# Altium PCB PCB_EN1093.PcbDoc
Units mm, origin at the board's own origin, x right, y up, seen from the top; angles counter-clockwise.
Board outline 80.26 x 60.25 mm, 2 copper layers (Top Layer, Bottom Layer); 26 components, 25 nets, 119 pads, 7 vias.
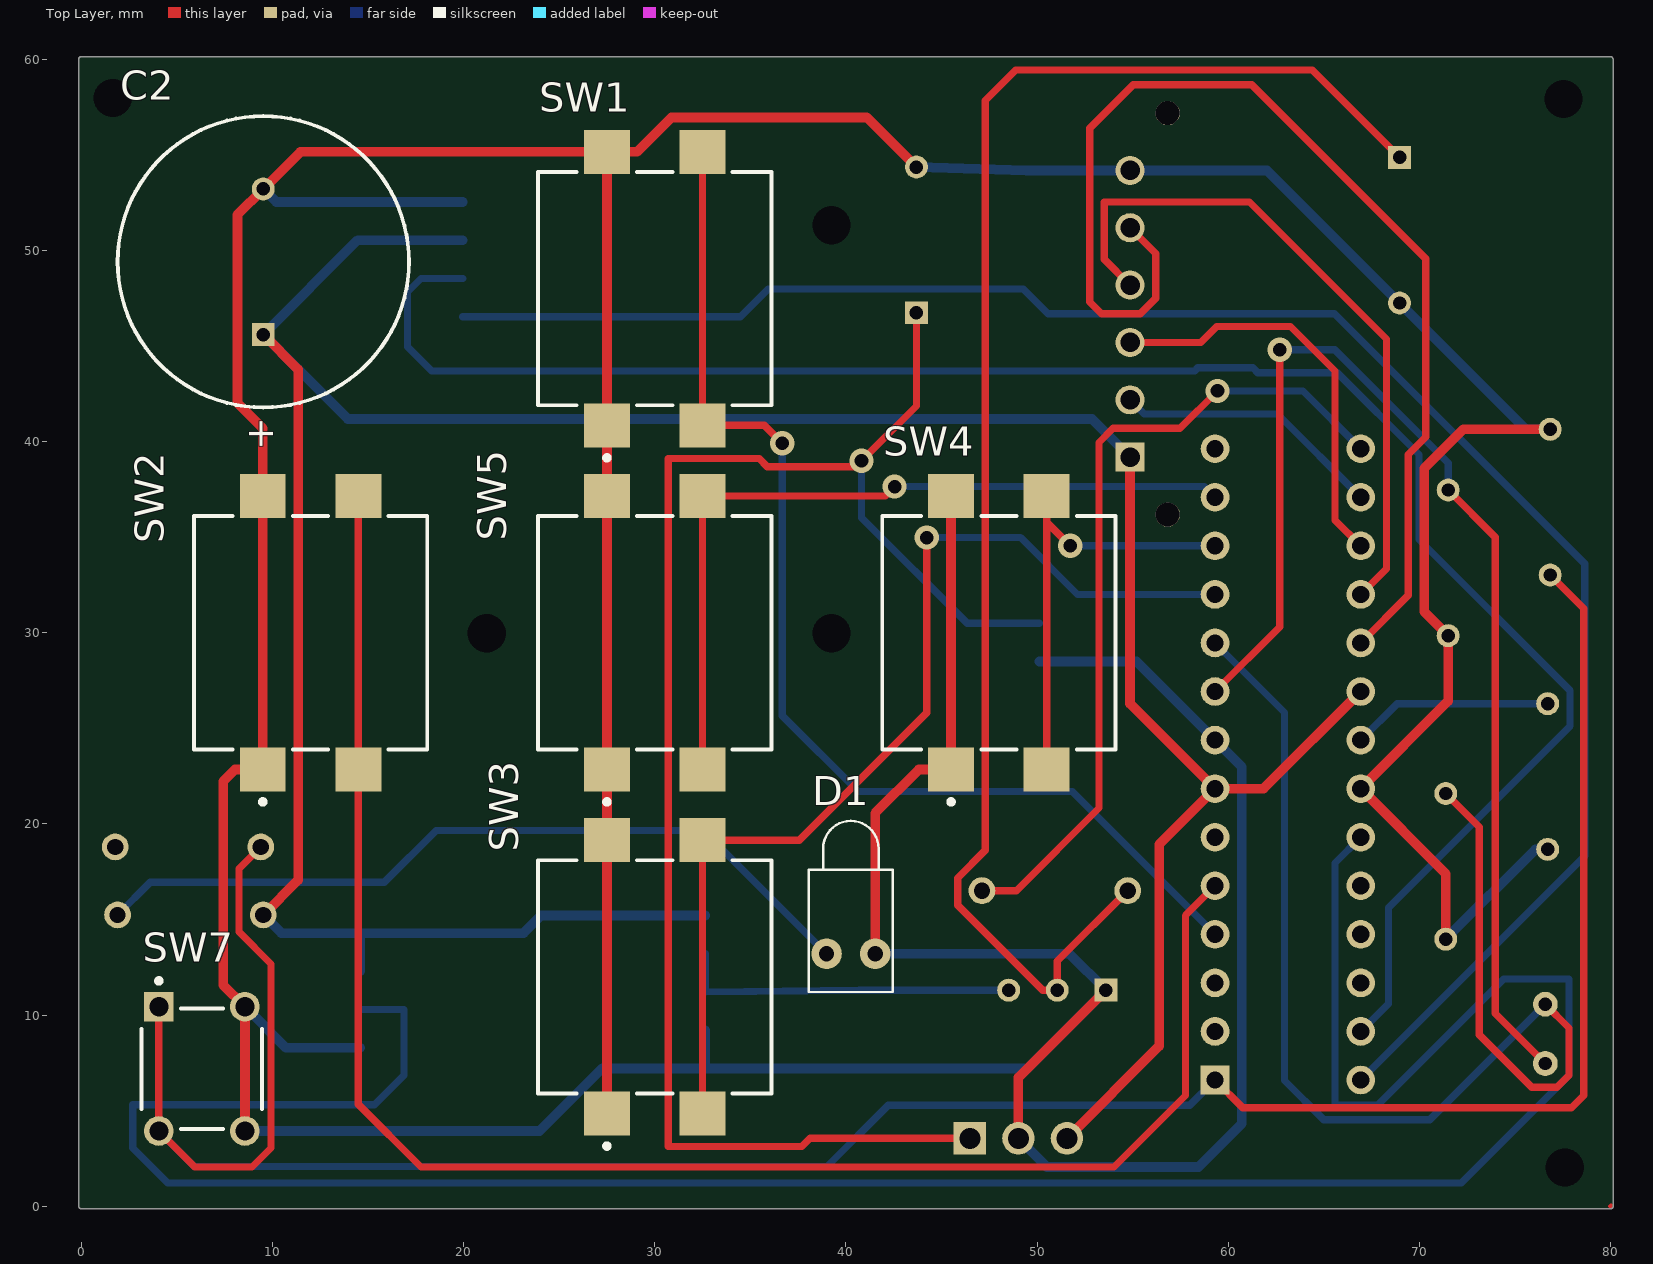
[diagram p0: Top Layer view]
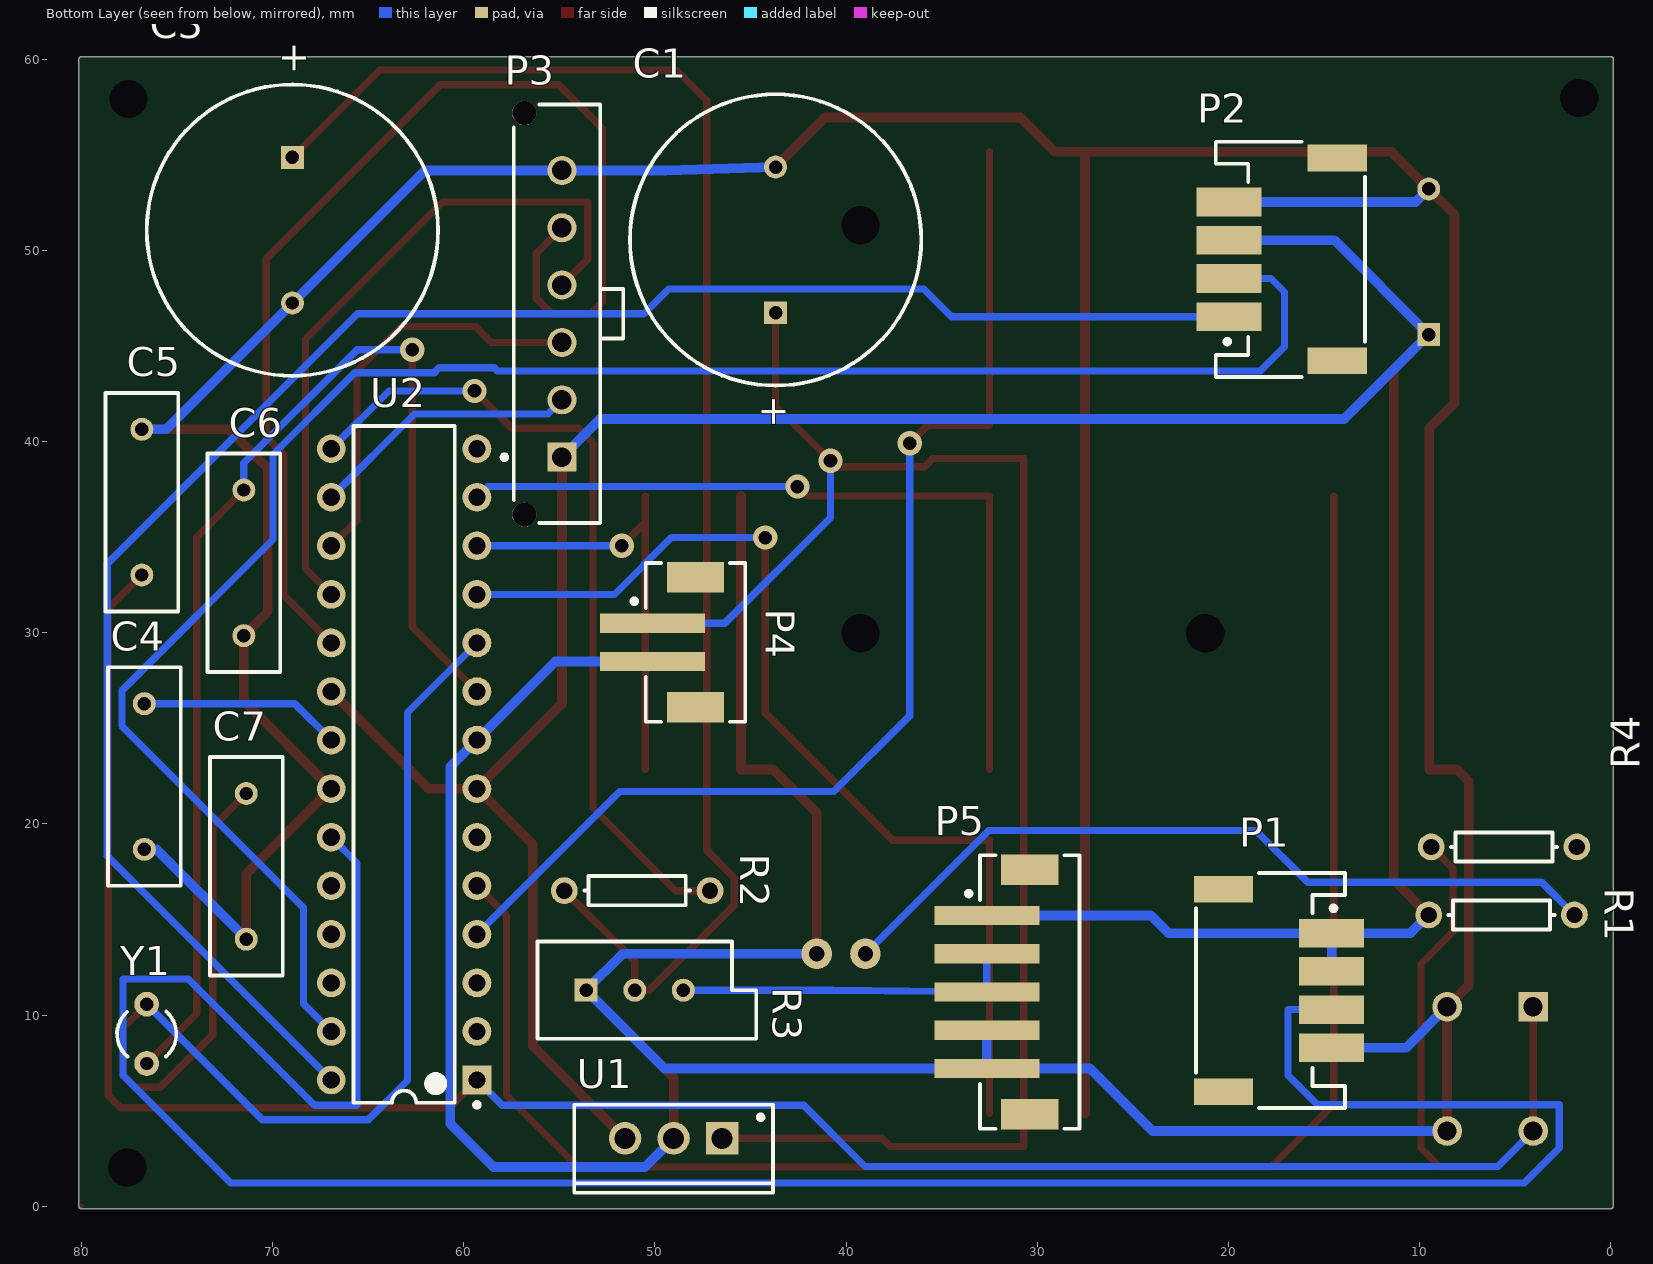
[diagram p1: Bottom Layer view, seen from below]
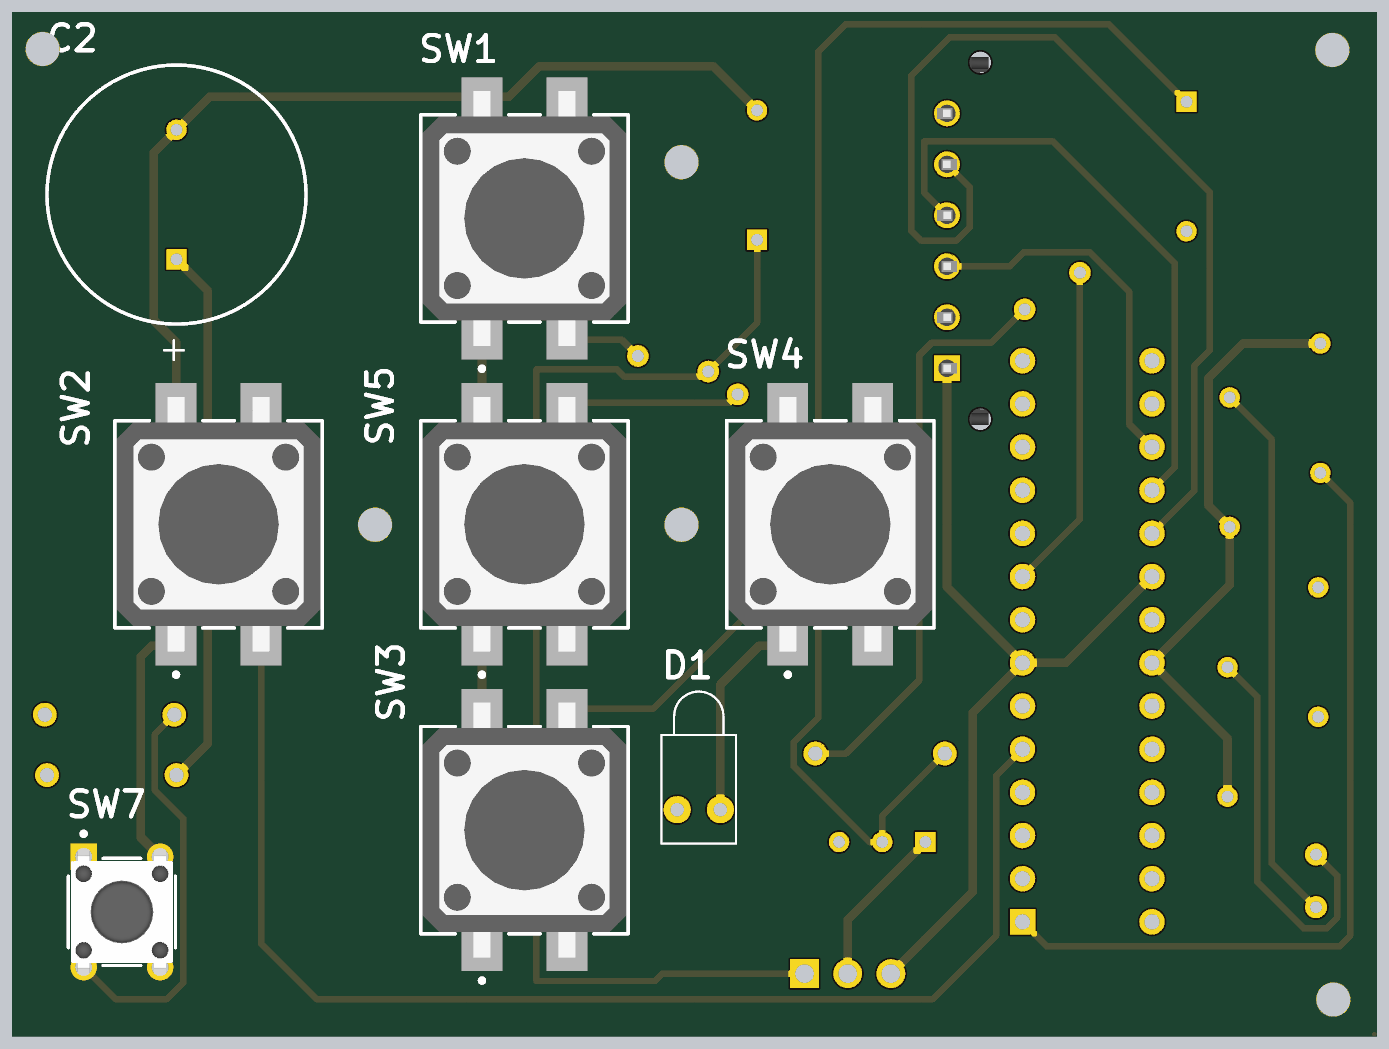
[diagram p2: 3D render of the assembled board from above, using the file's embedded part models]

## Layer stack, top to bottom
Top Solder: solder mask 0.0102, Solder Resist, Dk 3.5
Top Layer: signal copper 0.0356
Dielectric 1: dielectric 0.32, FR-4, Dk 4.8
Bottom Layer: signal copper 0.0356
Bottom Solder: solder mask 0.0102, Solder Resist, Dk 3.5

## Board outline
0,-0.127 cw(c0,0) -0.127,0 -0.127,60 cw(c0,60) 0,60.127 80,60.127 cw(c80,60) 80.127,60 80.127,0.059 cw(c80.01,0.01) 80.137,0.01 cw(c80.01,0.01) 80.1,-0.08 80.09,-0.09 cw(c80,-0.001) 80,-0.127

## Design rules (kind name [scope] priority, off if disabled: settings)
Clearance [All] p1: gap=0.381 ignorepadtopadclearanceinfootprint=TRUE except(0.508: Arc-Hole Track-Hole SMDPad-Hole THPad-Hole Via-Hole Fill-Hole Poly-Hole Region-Hole Text-Hole)
ComponentClearance [All] p1: gap=0.254 collisioncheckmode=3 verticalgap=0.508 showdistances=FALSE
PolygonConnect [All] p1: connectstyle=Relief reliefconductorwidth=0.254 reliefentries=4 polygonreliefangle="90 Angle" airgapwidth=0.254
RoutingVias [All] p1: holewidth=0.711 width=1.27 viastyle="Through Hole" minholewidth=0.711 minwidth=1.27 maxholewidth=0.711 maxwidth=1.27
SilkToSolderMaskClearance [IsPad] p1 off: minsilkscreentomaskgap=0.254 clearancetoexposedcopper=TRUE
SolderMaskExpansion [All] p1: expansion=0.102 istentingtop=FALSE
Width Width_1 [InNet('+5') or InNet('GND')] p1: maxlimit=0.635 minlimit=0.381 preferedwidth=0.508
Width [All] p2: maxlimit=0.508 minlimit=0.254 preferedwidth=0.381
28 further rules are at their usual default settings.

## Components (designator, comment, footprint, x,y, rotation, side; value= is the part's Value field where it differs from the comment)
C1 "330nF" RB7.6-15 43.688,50.546 r270 bottom
C2 "100nF" RB7.6-15 9.525,49.403 r270 top
C3 "Cap Pol1" RB7.6-15 68.961,51.054 r90 bottom value=10pF
C4 "100nF" RAD-0.3 76.708,22.479 r90 bottom
C5 "100nF" RAD-0.3 76.835,36.83 r270 bottom
C6 "22pF" RAD-0.3 71.501,33.655 r90 bottom
C7 "22pF" RAD-0.3 71.374,17.78 r90 bottom
D1 "LED1" LED-1 40.259,13.208 r90 top
P1 "620104131822" 620104131822 17.805,11.287 r270 bottom
P2 "620104131822" 620104131822 16.764,49.53 r90 bottom
P3 "66200611122" 66200611122 55.119,46.681 r270 bottom
P4 "620302124022" 620302124022 47.879,29.493 r90 bottom
P5 "620305124022" 620305124022 30.389,11.208 r90 bottom
R1 "330" AXIAL-0.3 5.715,15.24 r180 bottom
R2 "5K" AXIAL-0.3 50.927,16.51 r180 bottom
R3 "1K" VR5 51.054,11.303 r180 bottom
R4 "10K" AXIAL-0.3 5.588,18.796 r0 bottom
SW1 "B3FS-4052P" FP-B3FS-4052P-MFG 30,48 r90 top
SW2 "B3FS-4052P" FP-B3FS-4052P-MFG 12,30 r90 top
SW3 "B3FS-4052P" FP-B3FS-4052P-MFG 30,12 r90 top
SW4 "B3FS-4052P" FP-B3FS-4052P-MFG 48,30 r90 top
SW5 "B3FS-4052P" FP-B3FS-4052P-MFG 30,30 r90 top
SW7 "EVQ-PAG07K" FP-EVQ-PAG07K-MFG 6.314,7.187 r0 top
U1 "L7805CV" TO220 49.022,3.556 r0 bottom
U2 "ATmega328P-PU" 28P3 63.119,23.114 r0 bottom
Y1 "XTAL" R38 76.581,9.017 r180 bottom

## Footprints (in the part's own frame and the unit in brackets; to place one, negate y for a bottom-side part, rotate by r counter-clockwise, add the part's x,y. Pads: shape width x height; smd on the part's side, far side on the other; paste and mask are expansions set on the pad)
28P3 [mm] "28-Pin Plastic Dual In-Line Package (PDIP)"
  rect 1.5x1.5 hole 0.9: 1(-3.81,16.51)
  round 1.5 hole 0.9: 2(-3.81,13.97) 3(-3.81,11.43) 4(-3.81,8.89) 5(-3.81,6.35) 6(-3.81,3.81) 7(-3.81,1.27) 8(-3.81,-1.27) 9(-3.81,-3.81) 10(-3.81,-6.35) 11(-3.81,-8.89) 12(-3.81,-11.43) 13(-3.81,-13.97) 14(-3.81,-16.51) 15(3.81,-16.51) 16(3.81,-13.97) 17(3.81,-11.43) 18(3.81,-8.89) 19(3.81,-6.35) 20(3.81,-3.81) 21(3.81,-1.27) 22(3.81,1.27) 23(3.81,3.81) 24(3.81,6.35) 25(3.81,8.89) 26(3.81,11.43) 27(3.81,13.97) 28(3.81,16.51)
  silkscreen extent -3.93,-17.7 2.65,17.93, body extent -3.6,-17.65 3.6,17.65, height 4.58
66200611122 [mm] "3.00mm Male Single Row Vertical Header, 6p"
  rect 1.52x1.52 hole 1.02: 1(7.5,0.255)
  round 1.52 hole 1.02: 2(4.5,0.255) 3(1.5,0.255) 4(-1.5,0.255) 5(-4.5,0.255) 6(-7.5,0.255)
  round 1.27 hole 1.27 unplated: MH1(-10.5,-1.705) MH2(10.5,-1.705)
  silkscreen extent -10.95,-2.88 10.95,3.46, body extent -10.82,-2.19 10.83,3.38, height 9.93
620104131822 [mm] "2.00mm SMT Male Horizontal Shrouded Header, 4p"
  rect 1.5x3.4 smd: 1(-3,3.2) 2(-1,3.2) 3(1,3.2) 4(3,3.2)
  rect 1.4x3.1 smd: MP1(-5.3,-2.45) MP2(5.3,-2.45)
  silkscreen extent -6.15,-3.9 6.15,3.9, body extent -6,-3.8 6,4.8, height 5.57
620302124022 [mm] "2.00mm SMT Male Vertical Shrouded Header, 2p"
  rect 1x5.5 smd: 1(1,2.25) 2(-1,2.25)
  rect 1.6x3 smd: MP1(-3.4,0) MP2(3.4,0)
  silkscreen extent -4.15,-2.6 4.15,3.32, body extent -4,-2.5 4,4.51, height 6.77
620305124022 [mm] "2.00mm SMT Male Vertical Shrouded Header, 5p"
  rect 1x5.5 smd: 1(4,2.25) 2(2,2.25) 3(0,2.25) 4(-2,2.25) 5(-4,2.25)
  rect 1.6x3 smd: MP1(-6.4,0) MP2(6.4,0)
  silkscreen extent -7.15,-2.6 7.15,3.32, body extent -7,-2.5 7,4.51, height 6.77
AXIAL-0.3 [mm] "Axial Device, Thru-Hole; 2 Leads; 0.3 in Pin Spacing"
  round 1.4 hole 0.85: 1(-3.81,0) 2(3.81,0)
  silkscreen extent -2.77,-0.76 2.77,0.76
FP-B3FS-4052P-MFG [mm]
  rect 2.3x2.4 smd paste+0 mask+0: 1(-7.15,2.5) 2(7.15,2.5) 3(-7.15,-2.5) 4(7.15,-2.5)
  silkscreen extent -8.97,-6.1 6.1,6.1, body extent -8.4,-6.2 8.4,6.2, height 0.25
FP-EVQ-PAG07K-MFG [mm]
  rect 1.55x1.55 hole 1 paste-1000 mask+0: A(-2.25,3.25)
  round 1.55 hole 1 paste-1000 mask+0: A'(-2.25,-3.25) B(2.25,3.25) B'(2.25,-3.25)
  silkscreen extent -3.15,-3.15 3.15,4.72, body extent -3.25,-4.13 3.25,4.13, height 0.25
LED-1 [mm] "LED; 2 Leads"
  round 1.6 hole 0.8: 1(0,1.27) 2(0,-1.27)
  silkscreen extent -2,-2.2 6.95,2.2
R38 [mm] "Crystal, Thru-Hole; 2 Leads; Body 3.1 x 8.2 mm (Dia.xH)"
  round 1.3 hole 0.7: 1(0,1.55) 2(0,-1.55)
  silkscreen extent -1.55,-1.19 1.55,1.17
RAD-0.3 [mm] "Radial Cap, Thru-Hole; 2 Leads; 0.3 in Pin Spacing"
  round 1.2 hole 0.7: 1(-3.81,0) 2(3.81,0)
  silkscreen extent -5.71,-1.91 5.71,1.91
RB7.6-15 [mm] "Polarized Capacitor (Radial); 2 Leads"
  rect 1.2x1.2 hole 0.7: 1(3.81,0)
  round 1.2 hole 0.7: 2(-3.81,0)
  silkscreen extent -7.62,-7.62 7.62,7.62
TO220 [mm] "TO, Thru-Hole, Vertical, Heatsink Mounted; 3 In-Line Leads; Pitch 2.54 mm"
  rect 1.7x1.7 hole 1.1: 1(-2.54,0)
  round 1.7 hole 1.1: 2(0,0) 3(2.54,0)
  silkscreen extent -5.2,-1.75 5.2,2.85, body extent -5.25,-1.8 5.25,2.9, height 19.7
VR5 [mm] "Thru-Hole; 3 Leads"
  rect 1.2x1.2 hole 0.7: 1(-2.54,0)
  round 1.2 hole 0.7: 2(0,0) 3(2.54,0)
  silkscreen extent -5.08,-2.54 6.35,2.54

## Part data
C1 C2: library part "Cap Pol1", "Polarized Capacitor (Radial)", LatestRevisionDate=17-Jul-2002, LatestRevisionNote="Re-released for DXP Platform.", PackageDescription="Polarized Capacitor (Radial); 2 Leads", PackageReference=RB7.6-15, Published=8-Jun-2000, Publisher="Altium Limited"
C3: "Polarized Capacitor (Radial)", LatestRevisionDate=17-Jul-2002, LatestRevisionNote="Re-released for DXP Platform.", PackageDescription="Polarized Capacitor (Radial); 2 Leads", PackageReference=RB7.6-15, Published=8-Jun-2000, Publisher="Altium Limited"
C4 C5 C6 C7: library part Cap, "Capacitor", LatestRevisionDate=17-Jul-2002, LatestRevisionNote="Re-released for DXP Platform.", PackageDescription="Radial Cap, Thru-Hole; 2 Leads; 0.3 in Pin Spacing", PackageReference=RAD-0.3, Published=8-Jun-2000, Publisher="Altium Limited"
D1: "Typical RED GaAs LED", LatestRevisionDate=08-Jul-2005, LatestRevisionNote="Mech Layer 1 removed.", PackageDescription="LED; 2 Leads", PackageReference=LED-1, Published=8-Jun-2000, Publisher="Altium Limited"
P1 P2: library part CMP-1502-00671-1, "Male Shrouded Header WR-WTB, SMT, Right Angled, pitch 2 mm, 1 x 4 position", Contact Resistance=20mOhm, Manufacturer="Wurth Elektronik", Operating Temperature=-25to85degC, Working Voltage=100VAC, Datasheet URL=https://katalog.we-online.de/em/datasheet/6201xx131822.pdf, Gender=Male, Manufacturer URL=http://www.we-online.de, Mounting Technology=SMT, Orientation=RightAngled, Package Reference=620104131822, Packaging=TapeandReel, Part Number=620104131822, Pitch=2mm, Position=1x4, Publisher=WurthElektronik
P3: library part CMP-1502-00444-1, "THT Male Header WR-MPC3, Vertical, Single Row, pitch 3 mm, 6 pins", Contact Resistance=10mOhm, Manufacturer="Wurth Elektronik", Operating Temperature=-40to105degC, Working Voltage=250VAC, Datasheet URL=https://katalog.we-online.de/em/datasheet/6620xx11122.pdf, Gender=Male, Manufacturer URL=http://www.we-online.de, Mounting Technology=THT, Orientation=Vertical, Package Reference=66200611122, Packaging=Tube, Part Number=66200611122, Pin Number=6, Pitch=3mm, Publisher=WurthElektronik
P4: library part CMP-1502-00660-1, "Male Shrouded Header WR-WTB, SMT, Vertical, pitch 2 mm, 1 x 2 position", Contact Resistance=20mOhm, Manufacturer="Wurth Elektronik", Operating Temperature=-25to85degC, Working Voltage=100VAC, Datasheet URL=https://katalog.we-online.de/em/datasheet/6203xx124022.pdf, Gender=Male, Manufacturer URL=http://www.we-online.de, Mounting Technology=SMT, Orientation=Vertical, Package Reference=620302124022, Packaging=TapeandReel, Part Number=620302124022, Pitch=2mm, Position=1x2, Publisher=WurthElektronik
P5: library part CMP-1502-00663-1, "Male Shrouded Header WR-WTB, SMT, Vertical, pitch 2 mm, 1 x 5 position", Contact Resistance=20mOhm, Manufacturer="Wurth Elektronik", Operating Temperature=-25to85degC, Working Voltage=100VAC, Datasheet URL=https://katalog.we-online.de/em/datasheet/6203xx124022.pdf, Gender=Male, Manufacturer URL=http://www.we-online.de, Mounting Technology=SMT, Orientation=Vertical, Package Reference=620305124022, Packaging=TapeandReel, Part Number=620305124022, Pitch=2mm, Position=1x5, Publisher=WurthElektronik
R1 R2 R4: library part Res1, "Resistor", LatestRevisionDate=17-Jul-2002, LatestRevisionNote="Re-released for DXP Platform.", PackageDescription="Axial Device, Thru-Hole; 2 Leads; 0.3 in Pin Spacing", PackageReference=AXIAL-0.3, Published=8-Jun-2000, Publisher="Altium Limited"
R3: library part RPot, "Potentiometer", LatestRevisionDate=17-Jul-2002, LatestRevisionNote="Re-released for DXP Platform.", PackageDescription="Variable Resistor, Thru-Hole; 3 Leads", PackageReference=VR5, Published=8-Jun-2000, Publisher="Altium Limited", Set Position=0.5, Sim Note="Enter the Resistance value and the set point into parameter fields."
SW1 SW2 SW3 SW4 SW5: library part CMP-08834-000051-1, "SWITCH TACT SPST-NO 0.05A 24V", Max Operating Temperature=70°C, Max Voltage Rating (DC)=24V, Min Operating Temperature=-25°C, Operating Force=150gf, Illumination Type=Non-Illuminated, Mechanical Life=3000000Cycles, Mount="Surface Mount", Packaging="Tape and Reel", Radiation Hardening=No, RoHS Compliant=Yes, Switch Function=Off-Mom, Switch Travel=0.25mm, Termination="Gull Wing", Throw Configuration=SPST
SW7: library part CMP-05618-000034-1, "SWITCH TACTILE SPST-NO 0.02A 15V", Actuator Color=Black, Contact Current Rating=20mA, Contact Resistance=50mR, Max Operating Temperature=70°C, Max Voltage Rating (DC)=15V, Min Operating Temperature=-20°C, Operating Force=2.6N, Package Quantity=500, Actuator Length=3.1mm, Actuator Type=Standard, Current Rating=20mA, Depth=7.8mm, Electrical Life=50000Cycles, Illumination Type=Non-Illuminated, Lead Free="Lead Free", Length=6mm, Max Current Rating=20mA, Mechanical Life=50000Cycles, Mount="Through Hole", Orientation=Straight, Packaging=Bulk, Radiation Hardening=No, RoHS Compliant=Yes, Series=EVQPA, Size=6mm, Switch Function=Off-Mom, Switch Travel=0.25mm, Termination="PC Pin", Throw Configuration=SPST, Voltage Rating (DC)=15V
U1: library part CMP-0244-00483-1, "Positive Voltage Regulator, 5V, 3-Pin TO-220", ComponentLink1Description="Manufacturer URL", ComponentLink1URL=http://www.st.com, ComponentLink2Description=Datasheet, ComponentLink2URL=http://www.st.com/internet/com/TECHNICAL_RESOURCES/TECHNICAL_LITERATURE/DATASHEET/CD00000444.pdf, ComponentLink3Description="Package Specification", ComponentLink3URL=http://www.st.com/internet/com/TECHNICAL_RESOURCES/TECHNICAL_LITERATURE/PACKAGE_INFORMATION/CD00004649.pdf, DatasheetVersion=16/11/2011, PackageDescription="TO, Thru-Hole, Vertical, Heatsink Mounted; 3 In-Line Leads; Pitch 2.54 mm", PackageReference=TO220, PackageVersion=ver3.0
U2: library part CMP-0095-00013-2, "8-bit AVR Microcontroller, 32KB Flash, 1KB EEPROM, 2KB SRAM, 28-pin PDIP, Industrial Grade (-40°C to 85°C)", ComponentLink1Description="Manufacturer URL", ComponentLink1URL=http://www.atmel.com/, ComponentLink2Description="ATmega48A/48PA/88A/88PA/168A/168PA/328/328P Datasheet", ComponentLink2URL=http://www.atmel.com/dyn/resources/prod_documents/8271.pdf, ComponentLink3Description="ATmega48A/48PA/88A/88PA/168A/168PA/328/328P Summary", ComponentLink3URL=http://www.atmel.com/dyn/resources/prod_documents/8271S.pdf, DatasheetVersion="revD, May-2011", PackageDescription="28-lead (0.300\"/7.62mm Wide) Plastic Dual Inline Package (PDIP)", PackageReference=28P3, PackageVersion="revB, Sep-2001", RevisionNote="DatasheetVersion updated. URLs added."
Y1: "Crystal Oscillator", LatestRevisionDate=17-Jul-2002, LatestRevisionNote="Re-released for DXP Platform.", PackageDescription="Crystal, Thru-Hole; 2 Leads; Body 3.1 x 8.2 mm (Dia.xH)", PackageReference=R38, Published=8-Jun-2000, Publisher="Altium Limited"

## Free pads (board coordinates)
  oval 1.55x0.6 hole 2: 65(77.597,2.032) 66(21.209,29.972) 66(39.243,29.972) 66(39.243,51.308) 66(77.541,57.912) 68(1.651,57.968)

## Via types
v1: diameter 1.27, hole 0.711, Top Layer to Bottom Layer, 7 vias

## Nets (pads, with @x,y where several pads share a name; then routed paths per layer and width w, separated by ;. In a path a pad name is that pad's centre, name@x,y a point inside that pad or via, vN(x,y) a via of type N, cw(c..) or ccw(c..) an arc to the next point about the centre after c; other vN are vias at no path point)
+5: C2.1 P1.1 P1.2 P2.3 P3.1 P5.1 R1.1 U1.3 U2.7 U2.20 | length 168.6
  Top Layer w0.508: R1.1 11.354,17.069 11.354,43.764 C2.1 ; U1.3 56.388,8.382 56.388,18.923 U2.7 ; P3.1 54.864,26.289 U2.7 ; U2.20 61.849,21.844 U2.7
  Bottom Layer w0.508: R1.1 10.478,14.287 P1.1 ; P1.2 P1.1 ; P2.3 14.462,50.53 C2.1 13.945,41.173 52.872,41.173 P3.1 ; P5.1 24.06,15.208 23.139,14.287 P1.1
DLT: SW5.3 SW5.4 U2.13 | length 41.5
  Top Layer w0.381: SW5.3 SW5.4 42.052,37.15 v1(42.545,37.643)
  Bottom Layer w0.381: v1(42.545,37.643) 58.75,37.643 U2.13
GND: C1.2 C2.2 C3.2 C4.1 C5.1 C6.1 C7.1 D1.2 P1.4 P2.4 P3.6 P4.2 P5.4 P5.5 R3.1 SW1.1 SW1.2 SW2.1 SW2.2 SW3.1 SW3.2 SW4.1 SW4.2 SW5.1 SW5.2 SW7.B SW7.B' U1.2 U2.8 U2.22 | length 383.6
  Top Layer w0.508: SW7.B' SW7.B 7.428,11.573 7.428,22.226 8.052,22.85 SW2.1 SW2.2 9.5,40.69 8.179,42.012 8.179,51.867 C2.2 11.462,55.15 SW1.2 ; SW3.1 SW3.2 27.5,20.98 SW5.1 SW5.2 27.5,38.989 SW1.1 SW1.2 ; D1.2 41.529,20.564 43.815,22.85 SW4.1 SW4.2 ; C1.2 41.097,56.947 30.88,56.947 29.083,55.15 SW1.2 ; U1.2 49.022,6.731 R3.1 ; C7.1 71.374,17.399 U2.22 71.501,26.416 C6.1 70.256,31.09 70.256,38.608 72.288,40.64 C5.1
  Bottom Layer w0.508: SW7.B' 23.978,3.937 27.249,7.208 P5.5 ; SW7.B 10.714,8.287 P1.4 ; C2.2 10.208,52.53 P2.4 ; P5.4 P5.5 ; D1.2 51.689,13.208 R3.1 49.499,7.208 P5.5 ; C1.2 49.451,54.181 P3.6 62.024,54.181 C3.2 75.565,40.64 C5.1 ; U1.2 50.521,2.057 58.445,2.057 60.706,4.318 60.706,22.987 U2.8 55.2,28.493 P4.2 ; C7.1 76.073,18.669 C4.1
MIC: P1.3 U2.23 | length 135.6
  Bottom Layer w0.381: P1.3 16.891,10.287 16.891,6.858 15.342,5.309 2.692,5.309 2.692,3.048 4.521,1.219 72.187,1.219 77.826,6.858 77.826,11.887 74.411,11.887 67.806,5.282 65.583,5.282 65.583,17.958 U2.23
MISO: P3.4 U2.18 | length 36.5
  Top Layer w0.381: P3.4 53.518,49.527 53.518,52.527 61.112,52.527 68.275,45.364 68.275,33.35 U2.18
MOSI: P3.3 U2.17 | length 21.7
  Top Layer w0.381: P3.3 58.559,45.181 59.399,46.021 63.25,46.021 65.583,43.688 65.583,35.89 U2.17
NetC3_1: C3.1 R2.1 R3.2 | length 80.7
  Top Layer w0.381: R2.1 51.054,12.827 R3.2 50.29,11.303 45.845,15.748 45.845,17.169 47.295,18.618 47.295,57.836 48.888,59.429 64.396,59.429 C3.1
NetC4_2: C4.2 U2.21 | length 10.6
  Bottom Layer w0.381: U2.21 68.834,26.289 C4.2
NetC5_2: C5.2 R4.2 SW7.A SW7.A' U2.1 | length 136.5
  Top Layer w0.381: SW7.A SW7.A' 5.944,2.057 8.941,2.057 9.931,3.048 9.931,12.675 8.253,14.353 8.253,17.651 R4.2 ; U2.1 60.757,5.156 77.953,5.156 78.588,5.791 78.588,31.267 C5.2
  Bottom Layer w0.381: SW7.A' 5.918,2.083 39.014,2.083 42.215,5.283 57.988,5.283 U2.1
NetC6_2: C6.2 U2.9 Y1.2 | length 64.1
  Top Layer w0.381: U2.9 62.687,30.302 v1(62.687,44.806) ; C6.2 73.965,35.001 73.965,10.083 Y1.2
  Bottom Layer w0.381: v1(62.687,44.806) 65.568,44.806 71.501,38.873 C6.2
NetC7_2: C7.2 U2.10 Y1.1 | length 65.1
  Top Layer w0.381: C7.2 73.127,19.837 73.127,8.966 75.87,6.223 77.191,6.223 77.826,6.858 77.826,9.322 Y1.1
  Bottom Layer w0.381: U2.10 62.941,25.832 62.941,6.579 64.999,4.52 70.534,4.52 Y1.1
NetD1_1: D1.1 R1.2 | length 41.6
  Bottom Layer w0.381: R1.2 3.607,16.942 15.85,16.942 18.567,19.66 32.537,19.66 D1.1
NetP5_2: P5.2 P5.3 R3.3 | length 17.9
  Bottom Layer w0.381: P5.2 P5.3 40.684,11.303 R3.3
NXT: SW4.3 SW4.4 U2.12 | length 23.6
  Top Layer w0.381: SW4.3 50.5,35.784 ; SW4.4 50.5,35.784 ; v1(51.74,34.544) 50.5,35.784
  Bottom Layer w0.381: v1(51.74,34.544) U2.12
PLY: SW3.3 SW3.4 U2.11 | length 54.3
  Top Layer w0.381: SW3.3 SW3.4 37.565,19.15 44.221,25.806 v1(44.221,34.976)
  Bottom Layer w0.381: v1(44.221,34.976) 49.138,34.976 52.11,32.004 U2.11
PRVS: SW2.3 SW2.4 U2.5 | length 89.6
  Top Layer w0.381: SW2.4 SW2.3 14.5,5.337 17.78,2.057 54.026,2.057 57.76,5.791 57.76,15.215 U2.5
RCRD: SW1.3 SW1.4 U2.4 | length 60.5
  Top Layer w0.381: SW1.4 SW1.3 35.731,40.85 v1(36.678,39.903)
  Bottom Layer w0.381: v1(36.678,39.903) 36.678,25.654 40.64,21.692 51.841,21.692 U2.4
RX: U2.3
SCK: P3.5 U2.19 | length 61.2
  Top Layer w0.381: P3.5 56.21,49.835 56.21,47.498 55.397,46.685 53.365,46.685 52.756,47.295 52.756,56.388 55.035,58.667 61.221,58.667 70.333,49.555 70.333,40.234 69.418,39.319 69.418,31.953 U2.19
SCL: P2.1 U2.28 | length 97.1
  Bottom Layer w0.381: P2.1 34.49,46.53 35.941,47.981 49.276,47.981 50.571,46.685 65.557,46.685 78.641,33.601 78.641,18.316 U2.28
SDA: P2.2 U2.27 | length 99.4
  Bottom Layer w0.381: P2.2 17.78,48.53 17.069,47.819 17.069,44.958 18.339,43.688 58.242,43.688 58.407,43.853 61.291,43.853 61.545,43.599 65.697,43.599 69.977,39.319 69.977,34.874 77.879,26.972 77.879,25.121 68.377,15.618 68.377,10.592 U2.27
SPKR: R2.2 U2.15 | length 43.1
  Top Layer w0.381: R2.2 48.92,16.51 53.238,20.828 53.238,39.954 53.975,40.691 57.48,40.691 v1(59.436,42.647)
  Bottom Layer w0.381: v1(59.436,42.647) 63.906,42.647 U2.15
SS: P3.2 U2.16 | length 14.2
  Bottom Layer w0.381: P3.2 55.605,41.44 62.573,41.44 U2.16
TX: U2.2
VCC: C1.1 P4.1 U1.1 | length 85.9
  Top Layer w0.381: C1.1 43.688,41.859 v1(40.818,38.989) 40.517,38.688 35.888,38.688 35.46,39.116 30.709,39.116 30.709,3.124 37.694,3.124 38.125,3.556 U1.1
  Bottom Layer w0.381: v1(40.818,38.989) 40.818,36.017 46.342,30.493 P4.1
pads on no net: P1.MP1 P1.MP2 P2.MP1 P2.MP2 P3.MH1 P3.MH2 P4.MP1 P4.MP2 P5.MP1 P5.MP2 R4.1 U2.6 U2.14 U2.24 U2.25 U2.26
copper on no net: | length 0
  Top Layer w0.254: 80,0 80.01,0.01

## Text inside footprints (layer, text, board x,y; h text height)
C1: Bottom Overlay "+" at 44.425,42.414 h1.5 r90
C2: Top Overlay "+" at 8.788,41.271 h1.5 r270
C3: Bottom Overlay "+" at 68.224,59.186 h1.5 r270